# EAGLE board OwlClock (EAGLE 7.5.0)

Size 160 x 100 mm. Coordinates in mm from the lower left corner, seen from the top.
Outline: 0,0 160,0 160,100 0,100 0,0
Copper layers (1*16): Top 0.035mm / dielectric 1.5mm / Bottom 0.035mm
Design rules "default": minimum track width 10mil, minimum drill 24mil, track to track 8mil, track to pad 8mil, pad to pad 8mil, via to via 8mil, smd to smd 8mil, copper to edge 40mil, drill to drill 8mil, minimum pad ring 10mil, minimum via ring 8mil, stop-mask expansion 4mil, vias tented up to drill 0mil, thermal gap 10mil

## Footprints (pad centres in the part's own frame; a part is rotated, then mirrored left to right if it is on the bottom)
0603-CAP = smd 1.1 x 1: 1 -0.85,0; 2 0.85,0
CPOL-RADIAL-1000UF-25V = drill 0.7 pad 1.651 square: 1 2.54,0 | drill 0.7 pad 1.651: 2 -2.54,0
TACTILE-PTH = drill 1.016 pad 1.88: 1 -3.251,2.261; 2 3.251,2.261; 3 -3.251,-2.261; 4 3.251,-2.261
2X3-NS = drill 1.016 pad 1.88 square: 1 -2.54,-1.27 | drill 1.016 pad 1.88 octagon: 2 -2.54,1.27; 3 0,-1.27; 4 0,1.27; 5 2.54,-1.27; 6 2.54,1.27
POWER_JACK_PTH = drill 2.997 pad 4.318: GND 0,7.7; GNDBREAK 4.7,10.7; PWR 0,13.7
1X06 = drill 1.016 octagon: 1 -6.35,0; 2 -3.81,0; 3 -1.27,0; 4 1.27,0; 5 3.81,0; 6 6.35,0
WS2812B = smd 1.5 x 1: 1 -2.45,1.6; 2 -2.45,-1.6; 3 2.45,-1.6; 4 2.45,1.6
1X02_LOCK = drill 1.016 pad 1.88: 1 -0.178,0; 2 2.718,0
HC18U-V = drill 0.813: 1 -2.54,0; 2 2.54,0
0805 = smd 0.8 x 1.2: 1 -0.9,0; 2 0.9,0
DIL28-3 = drill 0.813 long: 1 -16.51,-3.81; 2 -13.97,-3.81; 3 -11.43,-3.81; 4 -8.89,-3.81; 5 -6.35,-3.81; 6 -3.81,-3.81; 7 -1.27,-3.81; 8 1.27,-3.81; 9 3.81,-3.81; 10 6.35,-3.81; 11 8.89,-3.81; 12 11.43,-3.81; 13 13.97,-3.81; 14 16.51,-3.81; 15 16.51,3.81; 16 13.97,3.81; 17 11.43,3.81; 18 8.89,3.81; 19 6.35,3.81; 20 3.81,3.81; 21 1.27,3.81; 22 -1.27,3.81; 23 -3.81,3.81; 24 -6.35,3.81; 25 -8.89,3.81; 26 -11.43,3.81; 27 -13.97,3.81; 28 -16.51,3.81

## Placement (x,y rotation side)
C1  22pF  [0603-CAP]  74.93,64.77 90 top
C2  0.22pF  [0603-CAP]  80.01,64.77 90 top
C3  0.1uF  [0603-CAP]  68.58,63.5 0 top
C4  0.1uF  [0603-CAP]  74.93,81.28 0 top
C5  [CPOL-RADIAL-1000UF-25V]  -115.57,-6.35 0 top  (outside the outline)
DOWN  SWITCH-MOMENTARY-2PTH  [TACTILE-PTH]  137.16,67.31 0 top
J1  AVR_SPI_PRG_6NS  [2X3-NS]  86.36,85.09 0 top
J2  POWER_JACKPTH  [POWER_JACK_PTH]  -2.54,91.44 270 top
JP1  [1X06]  127,90.17 270 top
LED_MODULE1:C1  0.1uF  [0603-CAP]  -67.31,15.24 0 top  (outside the outline)
LED_MODULE1:C2  0.1uF  [0603-CAP]  -73.66,15.24 0 top  (outside the outline)
LED_MODULE1:C3  0.1uF  [0603-CAP]  -80.01,15.24 0 top  (outside the outline)
LED_MODULE1:C4  0.1uF  [0603-CAP]  -86.36,15.24 0 top  (outside the outline)
LED_MODULE1:C5  0.1uF  [0603-CAP]  -92.71,15.24 0 top  (outside the outline)
LED_MODULE1:C6  0.1uF  [0603-CAP]  -99.06,15.24 0 top  (outside the outline)
LED_MODULE1:C7  0.1uF  [0603-CAP]  -17.78,21.59 0 top  (outside the outline)
LED_MODULE1:C8  0.1uF  [0603-CAP]  -24.13,21.59 0 top  (outside the outline)
LED_MODULE1:C9  0.1uF  [0603-CAP]  -30.48,21.59 0 top  (outside the outline)
LED_MODULE1:C10  0.1uF  [0603-CAP]  -60.96,15.24 0 top  (outside the outline)
LED_MODULE1:D1  [WS2812B]  -53.34,3.81 0 top  (outside the outline)
LED_MODULE1:D2  [WS2812B]  -74.93,3.81 0 top  (outside the outline)
LED_MODULE1:D3  [WS2812B]  -96.52,3.81 0 top  (outside the outline)
LED_MODULE1:D4  [WS2812B]  -30.48,10.16 0 top  (outside the outline)
LED_MODULE1:D5  [WS2812B]  -52.07,10.16 0 top  (outside the outline)
LED_MODULE1:D6  [WS2812B]  -73.66,10.16 0 top  (outside the outline)
LED_MODULE1:D7  [WS2812B]  -95.25,10.16 0 top  (outside the outline)
LED_MODULE1:D8  [WS2812B]  -30.48,16.51 0 top  (outside the outline)
LED_MODULE1:D9  [WS2812B]  -52.07,16.51 0 top  (outside the outline)
LED_MODULE1:D10  [WS2812B]  -31.75,3.81 0 top  (outside the outline)
LED_MODULE2:C1  0.1uF  [0603-CAP]  -67.31,39.37 0 top  (outside the outline)
LED_MODULE2:C2  0.1uF  [0603-CAP]  -73.66,39.37 0 top  (outside the outline)
LED_MODULE2:C3  0.1uF  [0603-CAP]  -80.01,39.37 0 top  (outside the outline)
LED_MODULE2:C4  0.1uF  [0603-CAP]  -86.36,39.37 0 top  (outside the outline)
LED_MODULE2:C5  0.1uF  [0603-CAP]  -92.71,39.37 0 top  (outside the outline)
LED_MODULE2:C6  0.1uF  [0603-CAP]  -99.06,39.37 0 top  (outside the outline)
LED_MODULE2:C7  0.1uF  [0603-CAP]  -17.78,45.72 0 top  (outside the outline)
LED_MODULE2:C8  0.1uF  [0603-CAP]  -24.13,45.72 0 top  (outside the outline)
LED_MODULE2:C9  0.1uF  [0603-CAP]  -30.48,45.72 0 top  (outside the outline)
LED_MODULE2:C10  0.1uF  [0603-CAP]  -60.96,39.37 0 top  (outside the outline)
LED_MODULE2:D1  [WS2812B]  -53.34,27.94 0 top  (outside the outline)
LED_MODULE2:D2  [WS2812B]  -74.93,27.94 0 top  (outside the outline)
LED_MODULE2:D3  [WS2812B]  -96.52,27.94 0 top  (outside the outline)
LED_MODULE2:D4  [WS2812B]  -30.48,34.29 0 top  (outside the outline)
LED_MODULE2:D5  [WS2812B]  -52.07,34.29 0 top  (outside the outline)
LED_MODULE2:D6  [WS2812B]  -73.66,34.29 0 top  (outside the outline)
LED_MODULE2:D7  [WS2812B]  -95.25,34.29 0 top  (outside the outline)
LED_MODULE2:D8  [WS2812B]  -30.48,40.64 0 top  (outside the outline)
LED_MODULE2:D9  [WS2812B]  -52.07,40.64 0 top  (outside the outline)
LED_MODULE2:D10  [WS2812B]  -31.75,27.94 0 top  (outside the outline)
LED_MODULE3:C1  0.1uF  [0603-CAP]  -67.31,63.5 0 top  (outside the outline)
LED_MODULE3:C2  0.1uF  [0603-CAP]  -73.66,63.5 0 top  (outside the outline)
LED_MODULE3:C3  0.1uF  [0603-CAP]  -80.01,63.5 0 top  (outside the outline)
LED_MODULE3:C4  0.1uF  [0603-CAP]  -86.36,63.5 0 top  (outside the outline)
LED_MODULE3:C5  0.1uF  [0603-CAP]  -92.71,63.5 0 top  (outside the outline)
LED_MODULE3:C6  0.1uF  [0603-CAP]  -99.06,63.5 0 top  (outside the outline)
LED_MODULE3:C7  0.1uF  [0603-CAP]  -17.78,69.85 0 top  (outside the outline)
LED_MODULE3:C8  0.1uF  [0603-CAP]  -24.13,69.85 0 top  (outside the outline)
LED_MODULE3:C9  0.1uF  [0603-CAP]  -30.48,69.85 0 top  (outside the outline)
LED_MODULE3:C10  0.1uF  [0603-CAP]  -60.96,63.5 0 top  (outside the outline)
LED_MODULE3:D1  [WS2812B]  -53.34,52.07 0 top  (outside the outline)
LED_MODULE3:D2  [WS2812B]  -74.93,52.07 0 top  (outside the outline)
LED_MODULE3:D3  [WS2812B]  -96.52,52.07 0 top  (outside the outline)
LED_MODULE3:D4  [WS2812B]  -30.48,58.42 0 top  (outside the outline)
LED_MODULE3:D5  [WS2812B]  -52.07,58.42 0 top  (outside the outline)
LED_MODULE3:D6  [WS2812B]  -73.66,58.42 0 top  (outside the outline)
LED_MODULE3:D7  [WS2812B]  -95.25,58.42 0 top  (outside the outline)
LED_MODULE3:D8  [WS2812B]  -30.48,64.77 0 top  (outside the outline)
LED_MODULE3:D9  [WS2812B]  -52.07,64.77 0 top  (outside the outline)
LED_MODULE3:D10  [WS2812B]  -31.75,52.07 0 top  (outside the outline)
LED_MODULE4:C1  0.1uF  [0603-CAP]  -67.31,87.63 0 top  (outside the outline)
LED_MODULE4:C2  0.1uF  [0603-CAP]  -73.66,87.63 0 top  (outside the outline)
LED_MODULE4:C3  0.1uF  [0603-CAP]  -80.01,87.63 0 top  (outside the outline)
LED_MODULE4:C4  0.1uF  [0603-CAP]  -86.36,87.63 0 top  (outside the outline)
LED_MODULE4:C5  0.1uF  [0603-CAP]  -92.71,87.63 0 top  (outside the outline)
LED_MODULE4:C6  0.1uF  [0603-CAP]  -99.06,87.63 0 top  (outside the outline)
LED_MODULE4:C7  0.1uF  [0603-CAP]  -17.78,93.98 0 top  (outside the outline)
LED_MODULE4:C8  0.1uF  [0603-CAP]  -24.13,93.98 0 top  (outside the outline)
LED_MODULE4:C9  0.1uF  [0603-CAP]  -30.48,93.98 0 top  (outside the outline)
LED_MODULE4:C10  0.1uF  [0603-CAP]  -60.96,87.63 0 top  (outside the outline)
LED_MODULE4:D1  [WS2812B]  -53.34,76.2 0 top  (outside the outline)
LED_MODULE4:D2  [WS2812B]  -74.93,76.2 0 top  (outside the outline)
LED_MODULE4:D3  [WS2812B]  -96.52,76.2 0 top  (outside the outline)
LED_MODULE4:D4  [WS2812B]  -30.48,82.55 0 top  (outside the outline)
LED_MODULE4:D5  [WS2812B]  -52.07,82.55 0 top  (outside the outline)
LED_MODULE4:D6  [WS2812B]  -73.66,82.55 0 top  (outside the outline)
LED_MODULE4:D7  [WS2812B]  -95.25,82.55 0 top  (outside the outline)
LED_MODULE4:D8  [WS2812B]  -30.48,88.9 0 top  (outside the outline)
LED_MODULE4:D9  [WS2812B]  -52.07,88.9 0 top  (outside the outline)
LED_MODULE4:D10  [WS2812B]  -31.75,76.2 0 top  (outside the outline)
PHOTO  M02LOCK  [1X02_LOCK]  67.31,86.36 0 top
Q1  [HC18U-V]  77.47,59.69 180 top
R1  10k  [0805]  57.15,63.5 0 top
R2  10k  [0805]  68.58,81.28 180 top
R3  470  [0805]  -120.65,2.54 0 top  (outside the outline)
SET  SWITCH-MOMENTARY-2PTH  [TACTILE-PTH]  5.08,67.31 0 top
U1  ATMEGA328P_PDIP  [DIL28-3]  72.39,72.39 0 top
UP  SWITCH-MOMENTARY-2PTH  [TACTILE-PTH]  137.16,80.01 0 top

## Library data of the parts
C1-C4 LED_MODULE1:C1-LED_MODULE1:C10 LED_MODULE2:C1-LED_MODULE2:C10 LED_MODULE3:C1-LED_MODULE3:C10 LED_MODULE4:C1-LED_MODULE4:C10 = SparkFun-Capacitors; PROD_ID: CAP-00810
C5 = SparkFun-Capacitors
DOWN SET UP = SparkFun-Electromechanical
J1 PHOTO = SparkFun-Connectors
J2 = SparkFun-Connectors; PROD_ID: PRT-00119
JP1 = adafruit
LED_MODULE1:D1-LED_MODULE1:D10 LED_MODULE2:D1-LED_MODULE2:D10 LED_MODULE3:D1-LED_MODULE3:D10 LED_MODULE4:D1-LED_MODULE4:D10 = SparkFun-LED
Q1 = adafruit; OC_FARNELL: unknown; OC_NEWARK: unknown
R1-R3 = SparkFun-Resistors; PROD_ID: RES-09883
U1 = SparkFun-DigitalIC

## Nets
32K: JP1.1
!RESET: J1.5 R1.1 U1.1
ADC0: PHOTO.1 R2.2 U1.23
DP0: U1.2 UP.1
DP1: DOWN.1 U1.3
DP2: SET.1 U1.4
GND: C1.1 C2.1 C3.2 C4.2 C5.2 DOWN.3 J1.6 J2.GND J2.GNDBREAK JP1.6 LED_MODULE1:C1.2 LED_MODULE1:C2.2 LED_MODULE1:C3.2 LED_MODULE1:C4.2 LED_MODULE1:C5.2 LED_MODULE1:C6.2 LED_MODULE1:C7.2 LED_MODULE1:C8.2 LED_MODULE1:C9.2 LED_MODULE1:C10.2 LED_MODULE1:D1.3 LED_MODULE1:D2.3 LED_MODULE1:D3.3 LED_MODULE1:D4.3 LED_MODULE1:D5.3 LED_MODULE1:D6.3 LED_MODULE1:D7.3 LED_MODULE1:D8.3 LED_MODULE1:D9.3 LED_MODULE1:D10.3 LED_MODULE2:C1.2 LED_MODULE2:C2.2 LED_MODULE2:C3.2 LED_MODULE2:C4.2 LED_MODULE2:C5.2 LED_MODULE2:C6.2 LED_MODULE2:C7.2 LED_MODULE2:C8.2 LED_MODULE2:C9.2 LED_MODULE2:C10.2 LED_MODULE2:D1.3 LED_MODULE2:D2.3 LED_MODULE2:D3.3 LED_MODULE2:D4.3 LED_MODULE2:D5.3 LED_MODULE2:D6.3 LED_MODULE2:D7.3 LED_MODULE2:D8.3 LED_MODULE2:D9.3 LED_MODULE2:D10.3 LED_MODULE3:C1.2 LED_MODULE3:C2.2 LED_MODULE3:C3.2 LED_MODULE3:C4.2 LED_MODULE3:C5.2 LED_MODULE3:C6.2 LED_MODULE3:C7.2 LED_MODULE3:C8.2 LED_MODULE3:C9.2 LED_MODULE3:C10.2 LED_MODULE3:D1.3 LED_MODULE3:D2.3 LED_MODULE3:D3.3 LED_MODULE3:D4.3 LED_MODULE3:D5.3 LED_MODULE3:D6.3 LED_MODULE3:D7.3 LED_MODULE3:D8.3 LED_MODULE3:D9.3 LED_MODULE3:D10.3 R2.1 SET.3 U1.8 U1.22 UP.3
LED_MODULE1:N$1: LED_MODULE1:D2.4 LED_MODULE1:D3.2
LED_MODULE1:N$5: LED_MODULE1:D1.4 LED_MODULE1:D2.2
LED_MODULE1:N$6: LED_MODULE1:D3.4 LED_MODULE1:D4.2
LED_MODULE1:N$7: LED_MODULE1:D4.4 LED_MODULE1:D5.2
LED_MODULE1:N$9: LED_MODULE1:D5.4 LED_MODULE1:D6.2
LED_MODULE1:N$10: LED_MODULE1:D6.4 LED_MODULE1:D7.2
LED_MODULE1:N$12: LED_MODULE1:D7.4 LED_MODULE1:D8.2
LED_MODULE1:N$13: LED_MODULE1:D8.4 LED_MODULE1:D9.2
LED_MODULE1:N$15: LED_MODULE1:D9.4 LED_MODULE1:D10.2
LED_MODULE2:N$1: LED_MODULE2:D2.4 LED_MODULE2:D3.2
LED_MODULE2:N$5: LED_MODULE2:D1.4 LED_MODULE2:D2.2
LED_MODULE2:N$6: LED_MODULE2:D3.4 LED_MODULE2:D4.2
LED_MODULE2:N$7: LED_MODULE2:D4.4 LED_MODULE2:D5.2
LED_MODULE2:N$9: LED_MODULE2:D5.4 LED_MODULE2:D6.2
LED_MODULE2:N$10: LED_MODULE2:D6.4 LED_MODULE2:D7.2
LED_MODULE2:N$12: LED_MODULE2:D7.4 LED_MODULE2:D8.2
LED_MODULE2:N$13: LED_MODULE2:D8.4 LED_MODULE2:D9.2
LED_MODULE2:N$15: LED_MODULE2:D9.4 LED_MODULE2:D10.2
LED_MODULE3:N$1: LED_MODULE3:D2.4 LED_MODULE3:D3.2
LED_MODULE3:N$5: LED_MODULE3:D1.4 LED_MODULE3:D2.2
LED_MODULE3:N$6: LED_MODULE3:D3.4 LED_MODULE3:D4.2
LED_MODULE3:N$7: LED_MODULE3:D4.4 LED_MODULE3:D5.2
LED_MODULE3:N$9: LED_MODULE3:D5.4 LED_MODULE3:D6.2
LED_MODULE3:N$10: LED_MODULE3:D6.4 LED_MODULE3:D7.2
LED_MODULE3:N$12: LED_MODULE3:D7.4 LED_MODULE3:D8.2
LED_MODULE3:N$13: LED_MODULE3:D8.4 LED_MODULE3:D9.2
LED_MODULE3:N$15: LED_MODULE3:D9.4 LED_MODULE3:D10.2
LED_MODULE4:DOUT: LED_MODULE4:D1.2
LED_MODULE4:GND: LED_MODULE4:C1.2 LED_MODULE4:C2.2 LED_MODULE4:C3.2 LED_MODULE4:C4.2 LED_MODULE4:C5.2 LED_MODULE4:C6.2 LED_MODULE4:C7.2 LED_MODULE4:C8.2 LED_MODULE4:C9.2 LED_MODULE4:C10.2 LED_MODULE4:D1.3 LED_MODULE4:D2.3 LED_MODULE4:D3.3 LED_MODULE4:D4.3 LED_MODULE4:D5.3 LED_MODULE4:D6.3 LED_MODULE4:D7.3 LED_MODULE4:D8.3 LED_MODULE4:D9.3 LED_MODULE4:D10.3
LED_MODULE4:N$1: LED_MODULE4:D2.4 LED_MODULE4:D3.2
LED_MODULE4:N$5: LED_MODULE4:D1.4 LED_MODULE4:D2.2
LED_MODULE4:N$6: LED_MODULE4:D3.4 LED_MODULE4:D4.2
LED_MODULE4:N$7: LED_MODULE4:D4.4 LED_MODULE4:D5.2
LED_MODULE4:N$9: LED_MODULE4:D5.4 LED_MODULE4:D6.2
LED_MODULE4:N$10: LED_MODULE4:D6.4 LED_MODULE4:D7.2
LED_MODULE4:N$12: LED_MODULE4:D7.4 LED_MODULE4:D8.2
LED_MODULE4:N$13: LED_MODULE4:D8.4 LED_MODULE4:D9.2
LED_MODULE4:N$15: LED_MODULE4:D9.4 LED_MODULE4:D10.2
MISO: J1.1 U1.18
MOSI: J1.4 U1.17
N$1: LED_MODULE1:D1.2 LED_MODULE2:D10.4
N$2: R3.1 U1.12
N$3: LED_MODULE2:D1.2 LED_MODULE3:D10.4
N$4: LED_MODULE3:D1.2 LED_MODULE4:D10.4
N$5: LED_MODULE1:D10.4 R3.2
N$17: C1.2 Q1.2 U1.9
N$18: C2.2 Q1.1 U1.10
PC0: PHOTO.2
SCK: J1.3 U1.19
SCL: JP1.3 U1.28
SDA: JP1.4 U1.27
SQW: JP1.2
VCC: C3.1 C4.1 C5.1 J1.2 J2.PWR JP1.5 LED_MODULE1:C1.1 LED_MODULE1:C2.1 LED_MODULE1:C3.1 LED_MODULE1:C4.1 LED_MODULE1:C5.1 LED_MODULE1:C6.1 LED_MODULE1:C7.1 LED_MODULE1:C8.1 LED_MODULE1:C9.1 LED_MODULE1:C10.1 LED_MODULE1:D1.1 LED_MODULE1:D2.1 LED_MODULE1:D3.1 LED_MODULE1:D4.1 LED_MODULE1:D5.1 LED_MODULE1:D6.1 LED_MODULE1:D7.1 LED_MODULE1:D8.1 LED_MODULE1:D9.1 LED_MODULE1:D10.1 LED_MODULE2:C1.1 LED_MODULE2:C2.1 LED_MODULE2:C3.1 LED_MODULE2:C4.1 LED_MODULE2:C5.1 LED_MODULE2:C6.1 LED_MODULE2:C7.1 LED_MODULE2:C8.1 LED_MODULE2:C9.1 LED_MODULE2:C10.1 LED_MODULE2:D1.1 LED_MODULE2:D2.1 LED_MODULE2:D3.1 LED_MODULE2:D4.1 LED_MODULE2:D5.1 LED_MODULE2:D6.1 LED_MODULE2:D7.1 LED_MODULE2:D8.1 LED_MODULE2:D9.1 LED_MODULE2:D10.1 LED_MODULE3:C1.1 LED_MODULE3:C2.1 LED_MODULE3:C3.1 LED_MODULE3:C4.1 LED_MODULE3:C5.1 LED_MODULE3:C6.1 LED_MODULE3:C7.1 LED_MODULE3:C8.1 LED_MODULE3:C9.1 LED_MODULE3:C10.1 LED_MODULE3:D1.1 LED_MODULE3:D2.1 LED_MODULE3:D3.1 LED_MODULE3:D4.1 LED_MODULE3:D5.1 LED_MODULE3:D6.1 LED_MODULE3:D7.1 LED_MODULE3:D8.1 LED_MODULE3:D9.1 LED_MODULE3:D10.1 LED_MODULE4:C1.1 LED_MODULE4:C2.1 LED_MODULE4:C3.1 LED_MODULE4:C4.1 LED_MODULE4:C5.1 LED_MODULE4:C6.1 LED_MODULE4:C7.1 LED_MODULE4:C8.1 LED_MODULE4:C9.1 LED_MODULE4:C10.1 LED_MODULE4:D1.1 LED_MODULE4:D2.1 LED_MODULE4:D3.1 LED_MODULE4:D4.1 LED_MODULE4:D5.1 LED_MODULE4:D6.1 LED_MODULE4:D7.1 LED_MODULE4:D8.1 LED_MODULE4:D9.1 LED_MODULE4:D10.1 R1.2 U1.7 U1.20

## Tracks (layer width: path | path; a pad name or v marks a point on that pad's centre or on a via)
!RESET  (2 unrouted)
ADC0  (2 unrouted)
DP0  (1 unrouted)
DP1  (1 unrouted)
DP2  (1 unrouted)
GND  (74 unrouted)
LED_MODULE1:N$1  (1 unrouted)
LED_MODULE1:N$5  (1 unrouted)
LED_MODULE1:N$6  (1 unrouted)
LED_MODULE1:N$7  (1 unrouted)
LED_MODULE1:N$9  (1 unrouted)
LED_MODULE1:N$10  (1 unrouted)
LED_MODULE1:N$12  (1 unrouted)
LED_MODULE1:N$13  (1 unrouted)
LED_MODULE1:N$15  (1 unrouted)
LED_MODULE2:N$1  (1 unrouted)
LED_MODULE2:N$5  (1 unrouted)
LED_MODULE2:N$6  (1 unrouted)
LED_MODULE2:N$7  (1 unrouted)
LED_MODULE2:N$9  (1 unrouted)
LED_MODULE2:N$10  (1 unrouted)
LED_MODULE2:N$12  (1 unrouted)
LED_MODULE2:N$13  (1 unrouted)
LED_MODULE2:N$15  (1 unrouted)
LED_MODULE3:N$1  (1 unrouted)
LED_MODULE3:N$5  (1 unrouted)
LED_MODULE3:N$6  (1 unrouted)
LED_MODULE3:N$7  (1 unrouted)
LED_MODULE3:N$9  (1 unrouted)
LED_MODULE3:N$10  (1 unrouted)
LED_MODULE3:N$12  (1 unrouted)
LED_MODULE3:N$13  (1 unrouted)
LED_MODULE3:N$15  (1 unrouted)
LED_MODULE4:GND  (19 unrouted)
LED_MODULE4:N$1  (1 unrouted)
LED_MODULE4:N$5  (1 unrouted)
LED_MODULE4:N$6  (1 unrouted)
LED_MODULE4:N$7  (1 unrouted)
LED_MODULE4:N$9  (1 unrouted)
LED_MODULE4:N$10  (1 unrouted)
LED_MODULE4:N$12  (1 unrouted)
LED_MODULE4:N$13  (1 unrouted)
LED_MODULE4:N$15  (1 unrouted)
MISO  (1 unrouted)
MOSI  (1 unrouted)
N$1  (1 unrouted)
N$2  (1 unrouted)
N$3  (1 unrouted)
N$4  (1 unrouted)
N$5  (1 unrouted)
N$17  (2 unrouted)
N$18  (2 unrouted)
SCK  (1 unrouted)
SCL  (1 unrouted)
SDA  (1 unrouted)
VCC  (88 unrouted)